# Altium PCB PCB1.PcbDoc
Units mm, origin at the board's own origin, x right, y up, seen from the top; angles counter-clockwise.
Board outline 152.4 x 101.6 mm, 2 copper layers (Top Layer, Bottom Layer); 72 components, 65 nets, 347 pads, 0 vias.
Unrouted connection lines stored in the file: 235.
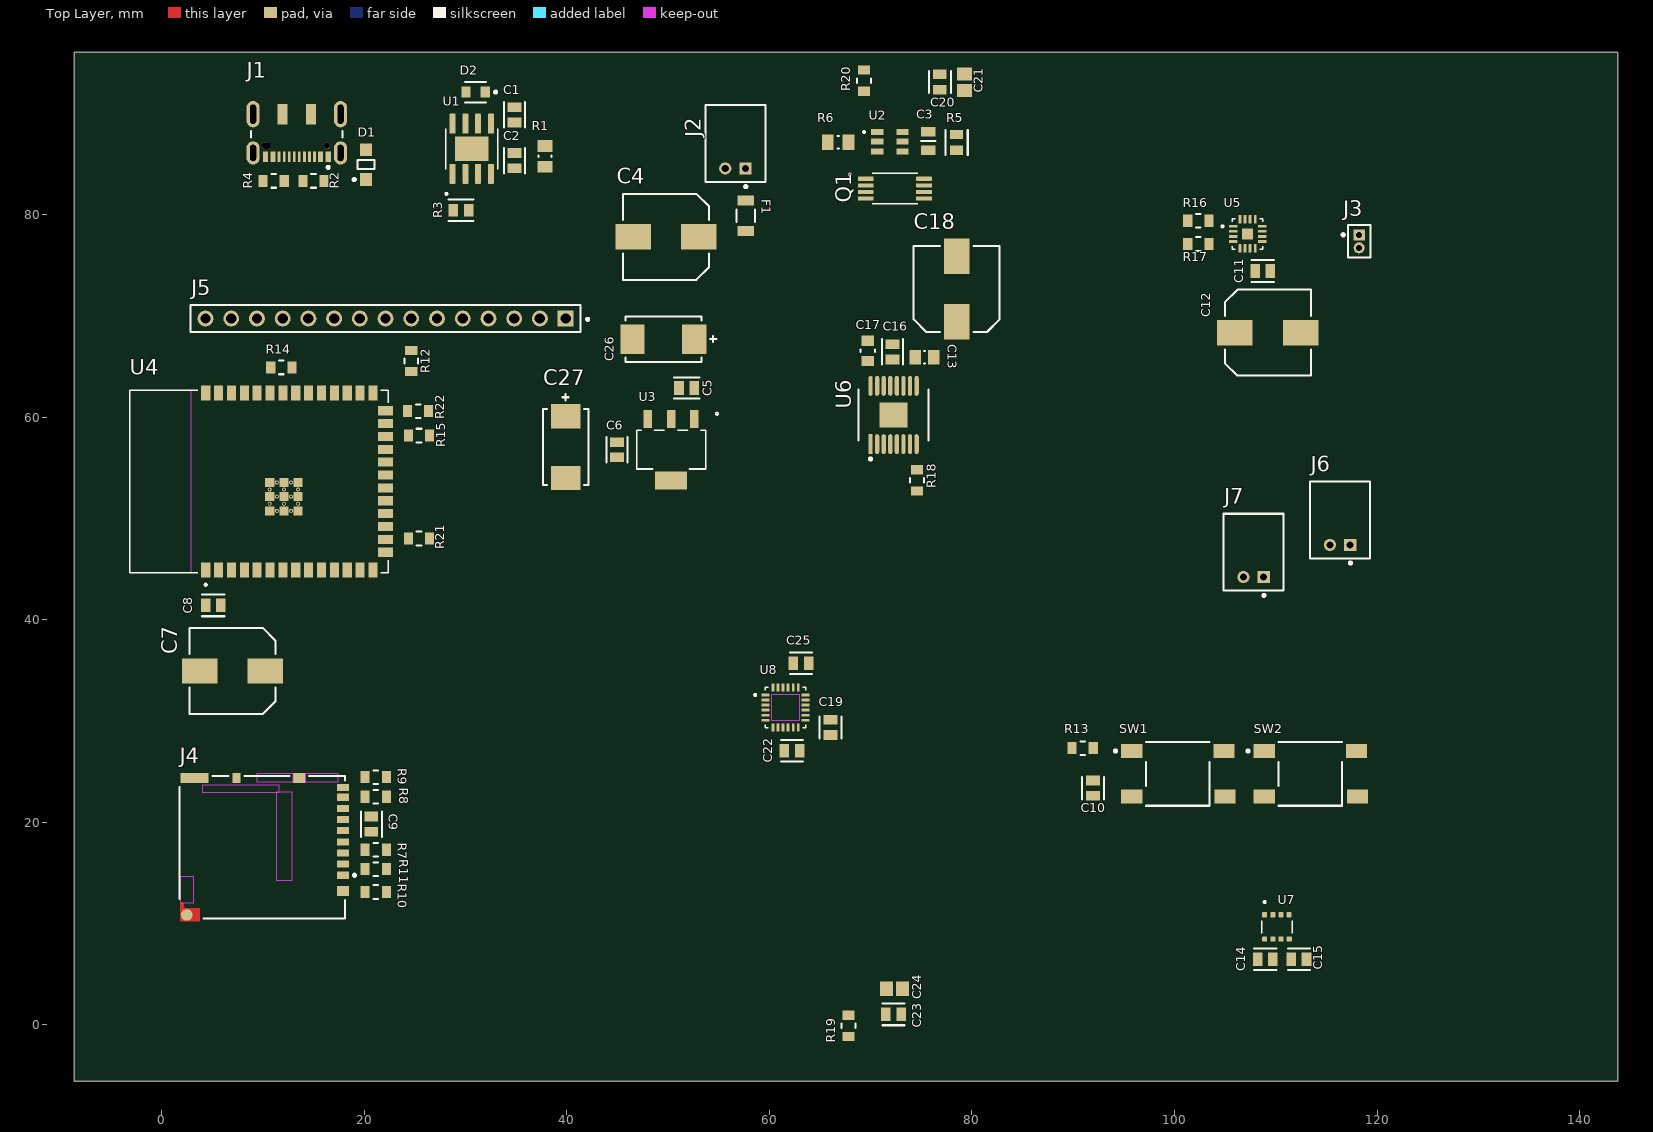
[diagram p0: Top Layer view]
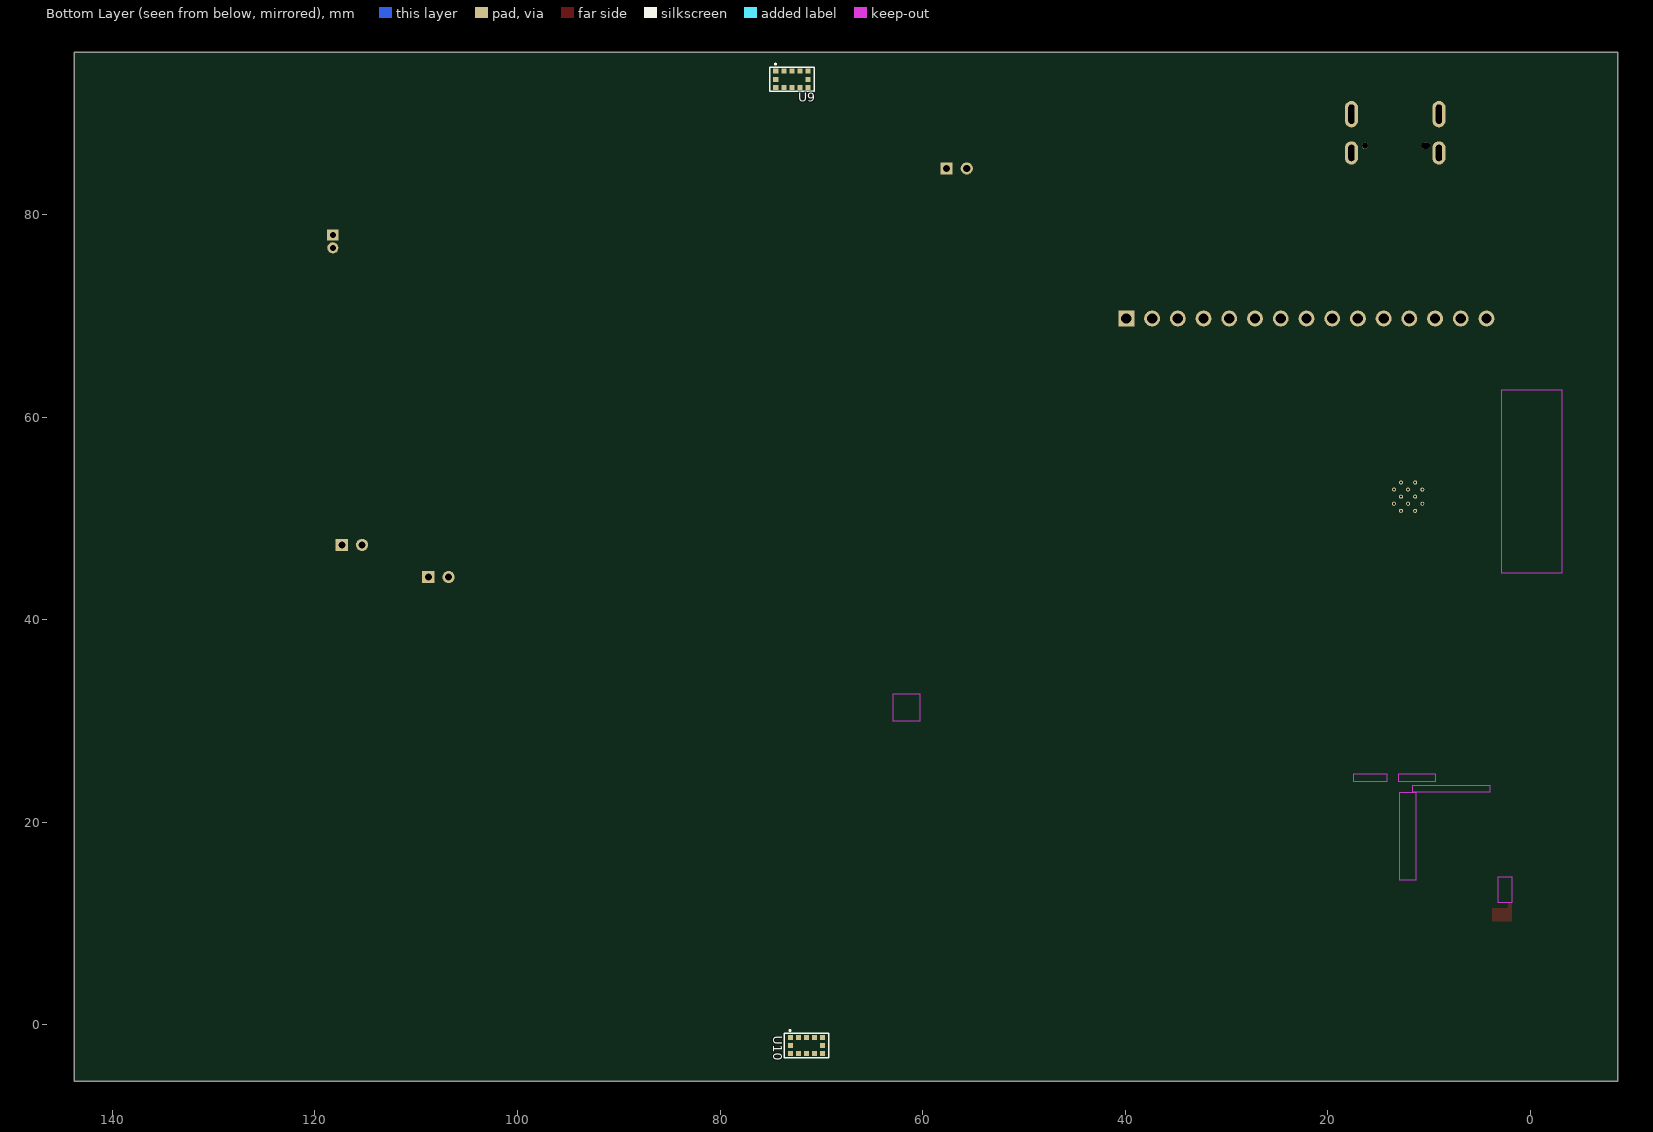
[diagram p1: Bottom Layer view, seen from below]

## Layer stack, top to bottom
Top Solder: solder mask 0.0102, Solder Resist, Dk 3.5
Top Layer: signal copper 0.0356
Dielectric 1: dielectric 0.32, FR-4, Dk 4.8
Bottom Layer: signal copper 0.0356
Bottom Solder: solder mask 0.0102, Solder Resist, Dk 3.5

## Board outline
-8.636,-5.588 143.764,-5.588 143.764,96.012 -8.636,96.012

## Design rules (kind name [scope] priority, off if disabled: settings)
Clearance [All] p1: gap=0.254 ignorepadtopadclearanceinfootprint=FALSE except(0.15: SMDPad-SMDPad)
PolygonConnect [All] p1: connectstyle=Relief reliefconductorwidth=0.254 reliefentries=4 polygonreliefangle="90 Angle" airgapwidth=0.254
RoutingVias [All] p1: holewidth=0.711 width=1.27 viastyle="Through Hole" minholewidth=0.711 minwidth=1.27 maxholewidth=0.711 maxwidth=1.27
SolderMaskExpansion [All] p1: expansion=0.102 istentingtop=FALSE
SupplyNets "Schematic Supply Nets_1" [InNet('3V3')] p1: voltage=0.000
SupplyNets "Schematic Supply Nets" [InNet('GND')] p2: voltage=0.000
Width [All] p1: maxlimit=0.254 minlimit=0.254 preferedwidth=0.254
30 further rules are at their usual default settings.

## Classes and differential pairs
component class Sensors: C13 C14 C15 C16 C17 C18 C19 C20 C21 C22 C23 C24 C25 J6 J7 R18 R19 R20 R21 R22 U6 U7 U8 U9 U10
component class Power: C1 C2 C3 C4 C5 C6 C26 C27 D1 D2 F1 J1 J2 Q1 R1 R2 R3 R4 R5 R6 U1 U2 U3
component class mcu: C7 C8 C9 C10 C11 C12 J3 J4 J5 R7 R8 R9 R10 R11 R12 R13 R14 R15 R16 R17 SW1 SW2 U4 U5

## Components (designator, comment, footprint, x,y, rotation, side; value= is the part's Value field where it differs from the comment)
C1 "C0805C106J8RACAUTO" FP-C0805C106J8RACAUTO-MFG 34.836,89.832 r90 top
C2 "C0805C106J8RACAUTO" FP-C0805C106J8RACAUTO-MFG 34.836,85.316 r90 top
C3 "CC0805KKX7RYBB104" FP-CC0805-EB-MFG 75.692,87.249 r90 top
C4 "UUD1V221MNL1GS" NIC-CAPA2-8X10_V 49.785,77.791 r180 top
C5 "C0805C106J8RACAUTO" FP-C0805C106J8RACAUTO-MFG 51.828,62.865 r180 top
C6 "C0805C106J8RACAUTO" FP-C0805C106J8RACAUTO-MFG 44.958,56.769 r270 top
C7 "UUD1V221MNL1GS" NIC-CAPA2-8X10_V 6.985,34.925 r180 top
C8 "C0805C104K4RACAUTO" FP-C0805C-DN-MFG 5.092,41.402 r180 top value="0.10 μF"
C9 "C0805C106J8RACAUTO" FP-C0805C106J8RACAUTO-MFG 20.701,19.8 r90 top
C10 "C0805C104K4RACAUTO" FP-C0805C-DN-MFG 91.948,23.356 r90 top value="0.10 μF"
C11 "C0805C104K4RACAUTO" FP-C0805C-DN-MFG 108.724,74.422 r0 top value="0.10 μF"
C12 "UUD1V221MNL1GS" NIC-CAPA2-8X10_V 109.22,68.326 r0 top
C13 "CAP 10nF 50V 0805(2012)" CAPC0805(2012)145_N 75.311,65.905 r0 top value=10nF
C14 "C0805C104K4RACAUTO" FP-C0805C-DN-MFG 108.964,6.448 r180 top value="0.10 μF"
C15 "C0805C104K4RACAUTO" FP-C0805C-DN-MFG 112.286,6.448 r180 top value="0.10 μF"
C16 "C0805C106J8RACAUTO" FP-C0805C106J8RACAUTO-MFG 72.157,66.427 r90 top
C17 "08053C225K4Z2A" FP-0805-L_2_01_0_2-W_1_25-MFG 69.723,66.532 r90 top
C18 "UUD1V221MNL1GS" NIC-CAPA2-8X10_V 78.486,72.644 r90 top
C19 "C0805C104K4RACAUTO" FP-C0805C-DN-MFG 66.04,29.349 r90 top value="0.10 μF"
C20 "C0805C104K4RACAUTO" FP-C0805C-DN-MFG 76.835,93.079 r270 top value="0.10 μF"
C21 "4.7 μF" CAPC2013X140X50NL20T25 79.264,93.053 r270 top
C22 "C0805C104K4RACAUTO" FP-C0805C-DN-MFG 62.23,27.051 r0 top value="0.10 μF"
C23 "C0805C104K4RACAUTO" FP-C0805C-DN-MFG 72.251,1.016 r0 top value="0.10 μF"
C24 "4.7 μF" CAPC2013X140X50NL20T25 72.352,3.556 r0 top
C25 "C0805C222J1GACAUTO" FP-C0805C-DN-MFG 63.119,35.687 r0 top value="2,200 pF"
C26 "10TPC100M" FP-POSCAP-D2-MFG 49.528,67.691 r0 top
C27 "10TPC100M" FP-POSCAP-D2-MFG 39.878,57.025 r90 top
D1 "SMF5.0AT1G" ONSC-SOD-123FL-2-498_V 20.169,84.925 r90 top
D2 "SML-LXT0805IW-TR" FP-SML-LXT0805IW-TR-MFG 30.988,92.075 r180 top
F1 "MF-NSMF200-2" FP-MF-NSMF200-2-MFG 57.658,79.883 r270 top value=85mΩ
J1 "DX07S016JA1R1500" FP-DX07S016JA1R1500-MFG 13.335,88.9 r180 top
J2 "(D)S2B-PH-K-S (LF)(SN)" FP-D_S2B-PH-K-S_LF_SN-MFG 56.642,86.995 r0 top
J3 "M50-3530242" FP-M50-3530242-MFG 118.237,77.343 r270 top
J4 "DM3AT-SF-PEJM5" FP-DM3AT-SF-PEJM5-MFG 9.906,17.526 r270 top
J5 "TSW-115-07-G-S" FP-TSW-115-07-G-S-MFG 22.098,69.723 r0 top
J6 "(D)S2B-PH-K-S (LF)(SN)" FP-D_S2B-PH-K-S_LF_SN-MFG 116.348,49.821 r0 top
J7 "(D)S2B-PH-K-S (LF)(SN)" FP-D_S2B-PH-K-S_LF_SN-MFG 107.807,46.646 r0 top
Q1 "FS8205A" SOP65P640X120-8N 72.39,82.55 r0 top
R1 "MCU0805MD1001BP100" FP-MCU0805-IPC_A 37.846,85.725 r270 top
R2 "AC0805JR-075K1L" FP-AC0805-MFG 14.986,83.312 r180 top value=5.1KΩ
R3 "RMCF0805JG1K20" FP-RMCF0805-IPC_C 29.547,80.413 r0 top
R4 "AC0805JR-075K1L" FP-AC0805-MFG 11.049,83.312 r180 top value=5.1KΩ
R5 "CRCW0805100RJNEAHP" FP-CRCW0805-HPe3-IPC_C 78.486,87.122 r90 top
R6 "MCU0805MD1001BP100" FP-MCU0805-IPC_A 66.782,87.12 r0 top
R7 "RT0805FRD0710KL" FP-RT0805-MFG 21.135,17.271 r180 top value=10KΩ
R8 "RT0805FRD0710KL" FP-RT0805-MFG 21.135,22.504 r180 top value=10KΩ
R9 "RT0805FRD0710KL" FP-RT0805-MFG 21.135,24.441 r180 top value=10KΩ
R10 "RT0805FRD0710KL" FP-RT0805-MFG 21.135,13.103 r0 top value=10KΩ
R11 "RT0805FRD0710KL" FP-RT0805-MFG 21.135,15.355 r0 top value=10KΩ
R12 "RT0805FRD0710KL" FP-RT0805-MFG 24.638,65.532 r90 top value=10KΩ
R13 "RT0805FRD0710KL" FP-RT0805-MFG 90.932,27.305 r180 top value=10KΩ
R14 "RT0805FRD0710KL" FP-RT0805-MFG 11.811,64.897 r180 top value=10KΩ
R15 "RT0805FRD0710KL" FP-RT0805-MFG 25.4,58.166 r180 top value=10KΩ
R16 "RT0805DRD07100KL" FP-RT0805-MFG 102.362,79.375 r180 top value=100KΩ
R17 "RT0805DRD07100KL" FP-RT0805-MFG 102.362,77.089 r180 top value=100KΩ
R18 "RT0805FRD0710KL" FP-RT0805-MFG 74.577,53.741 r90 top value=10KΩ
R19 "RT0805FRD0710KL" FP-RT0805-MFG 67.818,-0.127 r90 top value=10KΩ
R20 "RT0805FRD0710KL" FP-RT0805-MFG 69.342,93.218 r90 top value=10KΩ
R21 "RT0805FRD0710KL" FP-RT0805-MFG 25.4,48.006 r0 top value=10KΩ
R22 "RT0805FRD0710KL" FP-RT0805-MFG 25.307,60.579 r0 top value=10KΩ
SW1 "2-1977223-2" FP-2-1977223-2-MFG 100.33,24.765 r90 top
SW2 "2-1977223-2" FP-2-1977223-2-MFG 113.411,24.765 r90 top
U1 "TP4056" SOP127P600X175-9N 30.607,86.487 r90 top
U2 "DW01A" SOT95P280X145-6N 71.897,87.183 r0 top
U3 "AP2114HA-3.3TRG1" SOT-223_DIO 50.292,56.769 r180 top
U4 "ESP32-S3-WROOM-1-N16R2" XCVR_ESP32-S3-WROOM-1-N16R2 9.602,53.635 r90 top
U5 "MAX98357AETE+T" QFN50P300X300X80-17N 107.215,78.081 r0 top
U6 "DRV8833PWPR" FP-PWP0016C-IPC_A 72.263,60.198 r90 top
U7 "BME680" PSON80P300X300X100-8N 110.109,9.652 r0 top
U8 "MPU-6050" QFN50P400X400X95-24N 61.599,31.304 r0 top
U9 "VL53L0X" SENSOR_VL53L0X 72.898,93.345 r180 bottom
U10 "VL53L0X" SENSOR_VL53L0X 71.463,-2.07 r180 bottom

## Footprints (in the part's own frame and the unit in brackets; to place one, negate y for a bottom-side part, rotate by r counter-clockwise, add the part's x,y. Pads: shape width x height; smd on the part's side, far side on the other; paste and mask are expansions set on the pad)
CAPC0805(2012)145_N [mm] "Chip Capacitor, Body 2.0x1.2mm, Height 1.45mm, IPC Medium Density"
  rect 1.15x1.45 smd: 1(-0.9,0) 2(0.9,0)
  silkscreen extent -0.05,-0.62 0.05,0.63, body extent -1.1,-0.72 1.1,0.73, height 1.45
CAPC2013X140X50NL20T25 [mm] "Chip Capacitor, 2-Leads, Body 2.00x1.25mm, IPC Medium Density"
  rect 1.3x1.45 smd: 1(-0.8,0) 2(0.8,0)
  body extent -1.1,-0.72 1.1,0.72, height 1.4
FP-2-1977223-2-MFG [mm]
  rect 1.4x2.1 smd paste+0 mask+0: 1(2.25,4.55) 2(2.25,-4.55) 3(-2.25,4.55) 4(-2.25,-4.65)
  silkscreen extent -3.15,-3.15 3.15,6.27, body extent -3.25,-5.8 3.25,5.7, height 0.25
FP-0805-L_2_01_0_2-W_1_25-MFG [mm]
  rect 1x1.25 smd paste+0 mask+0: 1(-1,0) 2(1,0)
  silkscreen extent -0.13,-0.72 0.13,0.72, body extent -1.6,-0.82 1.6,0.82, height 0.25
FP-AC0805-MFG [mm]
  rect 0.9x1.2 smd paste+0 mask+0: 1(-1.05,0) 2(1.05,0)
  silkscreen extent -0.23,-0.67 0.23,0.67, body extent -1.6,-0.77 1.6,0.77, height 0.25
FP-C0805C106J8RACAUTO-MFG [mm]
  rect 0.95x1.35 smd paste+0 mask+0: 1(-0.75,0) 2(0.75,0)
  silkscreen extent -1.25,-1.05 1.25,1.05, body extent -1.4,-0.85 1.4,0.85, height 0.25
FP-C0805C-DN-MFG [mm]
  rect 0.95x1.35 smd paste+0 mask+0: 1(-0.75,0) 2(0.75,0)
  silkscreen extent -1.1,-1.07 1.1,1.07, body extent -1.4,-0.85 1.4,0.85, height 0.25
FP-CC0805-EB-MFG [mm]
  rect 0.95x1.4 smd paste+0 mask+0: 1(-0.925,0) 2(0.925,0)
  silkscreen extent 0,-0.72 0,0.72, body extent -1.6,-1.05 1.6,1.05, height 0.25
FP-CRCW0805-HPe3-IPC_C [mm]
  rect 0.906x1.308 smd paste+0 mask+0: 1(-0.776,0) 2(0.776,0)
  silkscreen extent -1.23,-1.1 1.23,1.1, body extent -1.33,-0.8 1.33,0.8, height 0.25
FP-D_S2B-PH-K-S_LF_SN-MFG [mm]
  rect 1.2x1.2 hole 0.7 paste-2539.97 mask+0: 1(1,-2.45)
  round 1.2 hole 0.7 paste-2539.97 mask+0: 2(-1,-2.45)
  silkscreen extent -2.95,-4.37 2.95,3.8, body extent -3.05,-3.9 3.05,3.9, height 0.25
FP-DM3AT-SF-PEJM5-MFG [mm]
  rect 0.7x1.2 smd paste+0 mask+0: 1(2.775,7.975) 2(1.675,7.975) 3(0.575,7.975) 4(-0.525,7.975) 5(-1.625,7.975) 6(-2.725,7.975) 7(-3.825,7.975) 8(-4.925,7.975) 9(-5.875,7.975)
  rect 1x0.8 smd paste+0 mask+0: 10(-6.825,-2.525)
  rect 1x1.2 smd paste+0 mask+0: 11(4.325,7.975) 12(-6.825,3.675)
  rect 1x2.8 smd paste+0 mask+0: 13(-6.825,-6.675)
  round 1.145 smd paste+0 mask+0: 14(6.689,-7.439)
  Top Layer region: 6.025,-6.175 7.325,-6.175 7.325,-8.075 5.475,-8.075 5.475,-7.725 5.875,-7.725 6.025,-7.575 6.025,-6.175
  Keep-Out Layer region: 2.925,-8.075 5.475,-8.075 5.475,-6.725 2.925,-6.725
  Keep-Out Layer region: -7.225,-0.525 -6.475,-0.525 -6.475,3.075 -7.225,3.075
  Keep-Out Layer region: -7.225,4.275 -6.475,4.275 -6.475,7.525 -7.225,7.525
  Keep-Out Layer region: -6.122,-5.925 -5.422,-5.925 -5.422,1.675 -6.122,1.675
  Keep-Out Layer region: -5.425,1.375 3.275,1.375 3.275,2.975 -5.425,2.975
  silkscreen extent -7.02,-8.18 7.02,9.25, body extent -7.42,-8.27 7.42,8.67, height 0.25
FP-DX07S016JA1R1500-MFG [mm]
  rrect100% 1.3x2.3 hole 1.6 slot 0.6 at 0 deg paste-2539.97 mask+0: 1(-4.32,2.825) 2(4.32,2.825)
  rrect100% 1.3x2.6 hole 1.9 slot 0.6 at 0 deg paste-2539.97 mask+0: 3(-4.32,-1) 6(4.32,-1)
  rect 1x2 smd paste+0 mask+0: 4(-1.4,-1) 5(1.4,-1)
  rect 0.52x1 smd paste+0 mask+0: A1/B12(-3.1,3.2) A4/B9(-2.35,3.2) A12/B1(3.1,3.2) B4/A9(2.35,3.2)
  rect 0.27x1 smd paste+0 mask+0: A5(-1.75,3.2) A6(-0.25,3.2) A7(0.75,3.2) A8(1.75,3.2) B5(1.25,3.2) B6(0.25,3.2) B7(-0.75,3.2) B8(-1.25,3.2)
  round 0.6 hole 0.6 unplated paste-2539.97 mask+0: ""(-3,2.1)
  rrect100% 0.85x0.6 hole 0.6 slot 0.85 at 0 deg unplated paste-2539.97 mask+0: ""(3,2.1)
  silkscreen extent -4.52,0.67 4.52,4.37, body extent -5.07,-3.75 5.07,4.08, height 0.25
FP-M50-3530242-MFG [mm]
  rect 1.1x1.1 hole 0.6 paste-2539.97 mask+0: 1(-0.635,0)
  round 1.1 hole 0.6 paste-2539.97 mask+0: 2(0.635,0)
  silkscreen extent -1.6,-1.7 1.6,1.1, body extent -1.62,-1.2 1.62,1.2, height 0.25
FP-MCU0805-IPC_A [mm]
  rect 1.159x1.508 smd paste+0 mask+0: 1(-1.027,0) 2(1.027,0)
  silkscreen extent -0.07,-0.63 0.07,0.63, body extent -2.11,-1.25 2.11,1.25, height 0.25
FP-MF-NSMF200-2-MFG [mm]
  rect 1x1.6 smd paste+0 mask+0: 1(-1.5,0) 2(1.5,0)
  silkscreen extent -0.63,-0.9 0.63,0.9, body extent -2.1,-1 2.1,1, height 0.25
FP-POSCAP-D2-MFG [mm]
  rect 2.4x2.9 smd paste+0 mask+0: 1(-3.05,0) 2(3.05,0)
  silkscreen extent -3.75,-2.25 5.23,2.25, body extent -4.35,-2.35 4.35,2.35, height 0.25
FP-PWP0016C-IPC_A [mm]
  rect 1.955x0.421 smd paste+0 mask+0: 1(-2.875,2.275)
  rrect100% 1.955x0.421 smd paste+0 mask+0: 2(-2.875,1.625) 3(-2.875,0.975) 4(-2.875,0.325) 5(-2.875,-0.325) 6(-2.875,-0.975) 7(-2.875,-1.625) 8(-2.875,-2.275) 9(2.875,-2.275) 10(2.875,-1.625) 11(2.875,-0.975) 12(2.875,-0.325) 13(2.875,0.325) 14(2.875,0.975) 15(2.875,1.625) 16(2.875,2.275)
  rect 2.46x2.77 smd paste-1000 mask+0: 17(0,0)
  silkscreen extent -4.48,-3.45 2.5,3.45, body extent -4.35,-3 4.35,3, height 0.25
FP-RMCF0805-IPC_C [mm]
  rect 0.955x1.262 smd paste+0 mask+0: 1(-0.776,0) 2(0.776,0)
  silkscreen extent -1.25,-1.07 1.25,1.07, body extent -1.35,-0.77 1.35,0.77, height 0.25
FP-RT0805-MFG [mm]
  rect 0.9x1.2 smd paste+0 mask+0: 1(-1.05,0) 2(1.05,0)
  silkscreen extent -0.23,-0.67 0.23,0.67, body extent -1.6,-0.77 1.6,0.77, height 0.25
FP-SML-LXT0805IW-TR-MFG [mm]
  rect 0.9x1.1 smd paste+0 mask+0: 1(-0.95,0) 2(0.95,0)
  silkscreen extent -2.1,-1 1.05,1, body extent -1.5,-0.8 1.5,0.8, height 0.25
FP-TSW-115-07-G-S-MFG [mm]
  rect 1.57x1.57 hole 1.02 paste-2539.97 mask+0: 1(17.78,0)
  round 1.57 hole 1.02 paste-2539.97 mask+0: 2(15.24,0) 3(12.7,0) 4(10.16,0) 5(7.62,0) 6(5.08,0) 7(2.54,0) 8(0,0) 9(-2.54,0) 10(-5.08,0) 11(-7.62,0) 12(-10.16,0) 13(-12.7,0) 14(-15.24,0) 15(-17.78,0)
  silkscreen extent -19.24,-1.34 20.09,1.34, body extent -19.34,-1.44 19.34,1.44, height 0.25
NIC-CAPA2-8X10_V [mm] "Aluminum Electrolytic Capacitor, Diameter 8mm, Height 10.8mm, Pitch 6.5mm"
  rect 3.5x2.5 smd: 1(-3.25,0) 2(3.25,0)
  silkscreen extent -4.25,-4.25 4.25,4.25, body extent -3.99,-3.97 3.99,4, height 10.8
ONSC-SOD-123FL-2-498_V [mm] "SOD, 2-Leads, Body 2.7x1.65mm"
  rect 1.25x1.22 smd: 1(-1.475,0) 2(1.475,0)
  silkscreen extent -1.6,-0.82 0.45,1.28, body extent -1.35,-0.82 1.35,0.82, height 0.98
PSON80P300X300X100-8N [mm]
  rrect25% 0.5x0.5 smd: 1(-1.2,1.2) 2(-0.4,1.2) 3(0.4,1.2) 4(1.2,1.2) 5(1.22,-1.2) 6(0.4,-1.2) 7(-0.4,-1.2) 8(-1.2,-1.2)
  silkscreen extent -1.5,-0.63 1.5,2.55, body extent -1.5,-1.5 1.5,1.5, height 1
QFN50P300X300X80-17N [mm]
  rrect25% 0.84x0.27 smd: 1(-1.435,0.75) 2(-1.435,0.25) 3(-1.435,-0.25) 4(-1.435,-0.75) 9(1.435,-0.75) 10(1.435,-0.25) 11(1.435,0.25) 12(1.435,0.75)
  rrect25% 0.27x0.84 smd: 5(-0.75,-1.435) 6(-0.25,-1.435) 7(0.25,-1.435) 8(0.75,-1.435) 13(0.75,1.435) 14(0.25,1.435) 15(-0.25,1.435) 16(-0.75,1.435)
  rect 1.1x1.1 smd paste-0.2: 17(0,0)
  silkscreen extent -2.57,-1.5 1.5,1.5, body extent -1.5,-1.5 1.5,1.5, height 0.9
QFN50P400X400X95-24N [mm]
  rect 0.79x0.28 smd: 1(-1.97,1.25) 2(-1.97,0.75) 3(-1.97,0.25) 4(-1.97,-0.25) 5(-1.97,-0.75) 6(-1.97,-1.25) 13(1.97,-1.25) 14(1.97,-0.75) 15(1.97,-0.25) 16(1.97,0.25) 17(1.97,0.75) 18(1.97,1.25)
  rect 0.28x0.79 smd: 7(-1.25,-1.97) 8(-0.75,-1.97) 9(-0.25,-1.97) 10(0.25,-1.97) 11(0.75,-1.97) 12(1.25,-1.97) 19(1.25,1.97) 20(0.75,1.97) 21(0.25,1.97) 22(-0.25,1.97) 23(-0.75,1.97) 24(-1.25,1.97)
  Keep-Out Layer region: 1.35,-1.3 -1.35,-1.3 -1.35,1.3 1.35,1.3
  silkscreen extent -3.1,-2 2,2, body extent -2,-2 2,2, height 0.93
SENSOR_VL53L0X [mm]
  rect 0.5x0.5 smd: 1(-1.6,0.8) 2(-0.8,0.8) 3(0,0.8) 4(0.8,0.8) 5(1.6,0.8) 6(1.6,0) 7(1.6,-0.8) 8(0.8,-0.8) 9(0,-0.8) 10(-0.8,-0.8) 11(-1.6,-0.8) 12(-1.6,0)
  silkscreen extent -2.2,-1.2 2.2,1.57
SOP65P640X120-8N [mm]
  rrect25% 1.56x0.4 smd: 1(-2.88,0.975) 2(-2.88,0.325) 3(-2.88,-0.325) 4(-2.88,-0.975) 5(2.88,-0.975) 6(2.88,-0.325) 7(2.88,0.325) 8(2.88,0.975)
  silkscreen extent -4.54,-1.52 2.25,1.52, body extent -3.2,-1.47 3.2,1.47, height 1.2
SOP127P600X175-9N [mm]
  rrect25% 1.97x0.6 smd: 1(-2.475,1.905) 2(-2.475,0.635) 3(-2.475,-0.635) 4(-2.475,-1.905) 5(2.475,-1.905) 6(2.475,-0.635) 7(2.475,0.635) 8(2.475,1.905)
  rect 2.413x3.302 smd paste-3: 9(0,0)
  silkscreen extent -4.54,-2.55 2,2.6, body extent -3,-2.45 3,2.45, height 1.75
SOT95P280X145-6N [mm]
  rect 1.21x0.59 smd: 1(-1.255,0.95) 2(-1.255,0) 3(-1.255,-0.95) 4(1.255,-0.95) 5(1.255,0) 6(1.255,0.95)
  silkscreen extent -2.65,0.85 -2.46,1.05, body extent -1.4,-1.45 1.4,1.45, height 1.45
SOT-223_DIO [mm]
  rect 0.851x1.761 smd paste+0 mask+0: 1(-2.3,-3.025) 2(0,-3.025) 3(2.3,-3.025)
  rect 3.151x1.761 smd paste+0 mask+0: 4(0,3.025)
  silkscreen extent -4.67,-3.68 3.4,1.9, body extent -3.27,-3.55 3.27,3.55, height 1.65
XCVR_ESP32-S3-WROOM-1-N16R2 [mm]
  rect 1.5x0.9 smd: 2(-8.75,3.99) 3(-8.75,2.72) 4(-8.75,1.45) 5(-8.75,0.18) 6(-8.75,-1.09) 7(-8.75,-2.36) 8(-8.75,-3.63) 9(-8.75,-4.9) 10(-8.75,-6.17) 11(-8.75,-7.44) 12(-8.75,-8.71) 13(-8.75,-9.98) 14(-8.75,-11.25) 27(8.75,-11.25) 28(8.75,-9.98) 29(8.75,-8.71) 30(8.75,-7.44) 31(8.75,-6.17) 32(8.75,-4.9) 33(8.75,-3.63) 34(8.75,-2.36) 35(8.75,-1.09) 36(8.75,0.18) 37(8.75,1.45) 38(8.75,2.72) 39(8.75,3.99) GND(-8.75,5.26) GND(8.75,5.26)
  rect 0.9x1.5 smd: 15(-6.985,-12.5) 16(-5.715,-12.5) 17(-4.445,-12.5) 18(-3.175,-12.5) 19(-1.905,-12.5) 20(-0.635,-12.5) 21(0.635,-12.5) 22(1.905,-12.5) 23(3.175,-12.5) 24(4.445,-12.5) 25(5.715,-12.5) 26(6.985,-12.5)
  round 0.4 hole 0.2 mask+0: 41_10(-1.5,-1.76) 41_11(-2.9,-1.76) 41_12(-0.1,-1.76) 41_13(-2.9,-3.16) 41_14(-1.5,-3.16) 41_15(-0.1,-3.16) 41_16(-2.2,-1.06) 41_17(-0.8,-1.06) 41_18(-2.2,-2.46) 41_19(-0.8,-2.46) 41_20(-2.2,-3.86) 41_21(-0.8,-3.86)
  rect 0.9x0.9 smd: GND(-2.9,-2.46) GND(-2.9,-1.06) GND(-2.9,-3.86) GND(-1.5,-1.06) GND(-1.5,-3.86) GND(-1.5,-2.46) GND(-0.1,-1.06) GND(-0.1,-2.46) GND(-0.1,-3.86)
  Keep-Out Layer region: 9,6.75 -9,6.75 -9,12.75 9,12.75
  Keep-Out Layer region: 9,6.75 -9,6.75 -9,12.75 9,12.75
  silkscreen extent -10.3,-12.75 9,12.75, body extent -9,-12.75 9,12.75, height 3.25

## Part data
C1 C2 C5 C6 C9 C16: library part CMP-03020-034708-1, "CAP CER 10UF 10V X7R 0805", Capacitance=10uF, Case Code (Imperial)=0805, Case Code (Metric)=2012, Max Operating Temperature=125°C, Min Operating Temperature=-55°C, Ratings=AEC-Q200, Tolerance=5%, Voltage Rating=10V, Case/Package=0805, Mount="Surface Mount", Packaging="Tape and Reel", RoHS Compliant=Yes
C3: library part CMP-00621-107850848-1, "CC0805KKX7RYBB104 Capacitor Ceramic 0.01uF 250V X7R 10% 0805 T/R", Capacitance=100nF, Case/Package=0805, Max Operating Temperature=125°C, Min Operating Temperature=-55°C, Tolerance=10%, Voltage Rating=250V, Height=1.45mm, Material=Ceramic, NexarPartId=107850848
C4 C7 C12 C18: library part CMP-0687-00080-1, "Aluminum Electrolytic Capacitor, UD Series, Low Impedance, 220 uF, 35 V, + / - 20%, -55 to 105 degC, Chip Type, 8 x 10 mm D x L, Pb-Free, Reel", Manufacturer=Nichicon, Rated Capacitance="220 uF", Rated Ripple Current (at 100kHz)="450 mA", Rated Voltage="35 V", Tolerance Rated Capacitance="-20 to 20%", ComponentLink1Description="Manufacturer URL", ComponentLink1URL=http://www.nichicon.co.jp/, ComponentLink2Description=Datasheet, ComponentLink2URL=http://products.nichicon.co.jp/en/pdf/XJA043/e-ud.pdf, ComponentLink3Description="Package Specification", ComponentLink3URL=http://products.nichicon.co.jp/en/pdf/XJA043/e-ud.pdf, DatasheetVersion=08/2012, Diameter="8 mm", Endurance Time="5000 h", Impedance="0.17 Ohm", Length="10 mm", Mounting Technology="Surface Mount", PackageDescription="2-Pin Surface Mount Device, Diameter 8 mm, Height 10 mm, Pitch 6.5 mm", PackageReference=CAPAE-D8H10, Packing="Dia382mm Reel", PartNumber=UUD1V221MNL1GS, RoHS=TRUE
C8 C10 C11 C14 C15 C19 C20 C22 C23: library part CMP-03020-005702-2, "C0805 0.10 μF X7R 30ppm/°C 10.00% 16 V", Capacitance="0.10 μF", Manufacturer=KEMET, Package=C0805C-DN, Temperature="-55°C to +125°C", Temperature Characteristic=X7R, Temperature Coefficient=30ppm/°C, Temperature Range High=+125°C, Temperature Range Low=-55°C, Tolerance=0.1, Voltage Rating="16 V", Automotive=No, Category=Cap, ComponentLink2Description=Datasheet, ComponentLink2URL=https://content.kemet.com/datasheets/KEM_C1003_C0G_SMD.pdf, Device Class L1="Passive Components", Device Class L2=Capacitors, Device Class L3="Ceramic Capacitors", Height=0.88mm, Ipc Land Pattern Name=CAPC200125X78, Lead Free=Yes, Manufacturer Part Number=C0805C104K4RACAUTO, Material=Ceramic, Octopart=https://octopart.com/c0805c104k4racauto-kemet-91893969, RoHS=TRUE
C13: library part CMP-1036-03843-1, "CAP 10nF 50V ±10% 0805 (2012 Metric) Thickness 1.45mm SMD", Case-EIA=0805, Case-Metric=2012, Rated Voltage="50 V", Tolerance=Â±10%, Max Thickness="1.45 mm", Technology=SMT
C17: library part CMP-04427-000048-1, "CAP CER 2.2UF 25V X7R 0805", Capacitance=2.2uF, Case Code (Imperial)=0805, Case Code (Metric)=2012, Max Operating Temperature=125°C, Min Operating Temperature=-55°C, Ratings=AEC-Q200, Tolerance=10%, Voltage Rating=25V, Case/Package=0805, Features="Soft Termination", Mount="Surface Mount", Packaging="Tape and Reel"
C21 C24: library part CMP-2007-04614-1, Manufacturer="AVX Interconnect / Elco", Part Number=08053D475KAT2A
C25: library part CMP-03020-010901-1, "C0805 2,200 pF C0G 30ppm/°C 5.00% 100 V", Capacitance="2,200 pF", Manufacturer=KEMET, Package=C0805C-DN, Temperature="-55°C to +125°C", Temperature Characteristic=C0G, Temperature Coefficient=30ppm/°C, Temperature Range High=+125°C, Temperature Range Low=-55°C, Tolerance=0.05, Voltage Rating="100 V", Automotive=No, Category=Cap, ComponentLink2Description=Datasheet, ComponentLink2URL=https://content.kemet.com/datasheets/KEM_C1003_C0G_SMD.pdf, Device Class L1="Passive Components", Device Class L2=Capacitors, Device Class L3="Ceramic Capacitors", Height=0.88mm, Ipc Land Pattern Name=CAPC200125X78, Lead Free=Yes, Manufacturer Part Number=C0805C222J1GACAUTO, Material=Ceramic, Octopart=https://octopart.com/c0805c222j1gacauto-kemet-75613142, RoHS=TRUE
C26 C27: library part CMP-05428-000328-1, "Molded Tantalum Polymer Capacitor 100uF 20% 10V life 2000Hours SMD 2917", Capacitance=100uF, Case Code (Imperial)=2917, Case Code (Metric)=7343, ESR (Equivalent Series Resistance)=45mR, Leakage Current=100uA, Max Operating Temperature=105°C, Min Operating Temperature=-55°C, Package Quantity=3000, Ripple Current=1.7A, Tolerance=20%, Voltage=10V, Case/Package=2917, Construction=Flat, Depth=4.3mm, Dissipation Factor=10%, Features="General Purpose", Height=1.9mm, Height - Seated (Max)=0.079inch, Lead Free="Lead Free", Length=7.3mm, Mount="Surface Mount", Number of Pins=2, Packaging="Tape and Reel", Polarity=Polar, Radiation Hardening=No, REACH SVHC="No SVHC", RoHS Compliant=Yes, Series="POSCAP™ TPC", Termination=SMD/SMT, Voltage Rating=10V, Voltage Rating (DC)=10V, Width=4.3mm
D1: library part CMP-1061-00612-1, "200 W Transient Voltage Suppressor, 2-Pin SOD-123FL, Pb-Free, Tape and Reel", Manufacturer="On Semiconductor", ComponentLink1Description="Manufacturer URL", ComponentLink1URL=http://www.onsemi.com/, ComponentLink2Description=Datasheet, ComponentLink2URL=http://www.onsemi.com/pub_link/Collateral/SMF5.0AT1-D.PDF, ComponentLink3Description="Package Specification", ComponentLink3URL=http://www.onsemi.com/pub_link/Collateral/498-01.PDF, DatasheetVersion="Rev. 7", Direction=Unidirectional, IR Max (uA)=400, Mounting Technology="Surface Mount", PackageDescription="2-Pin SOD, Body 1.65 x 2.7 mm", PackageReference=SOD-123FL-2-498, PackageVersion="Rev. D, 05/2013", Packing="Tape and Reel", PartNumber=SMF5.0AT1G, RoHS=Pb-Free, V(BR) Typ (V)=6.7
D2: library part CMP-1724-00002-2, "LED RED DIFFUSED SMD", Case Code (Imperial)=0805, Case Code (Metric)=2012, Color=Red, Forward Current=20mA, Forward Voltage=2V, Lens Color=White, Max Operating Temperature=80°C, Min Operating Temperature=-25°C, Package Quantity=1, Approvals=UL, Case/Package=0805, Dominant Wavelength=635nm, Height=0.8mm, Illumination Color=Red, Lead Free="Lead Free", Length=2mm, Lens Style=Rectangular, Lens Transparency=Diffused, Luminous Intensity=11mcd, Mount="Surface Mount", Number of LEDs=1, Number of Pins=2, Packaging="Tape and Reel", REACH SVHC="No SVHC", Test Current=20mA, Viewing Angle=140°, Wavelength=635nm, Width=1.25mm
F1: library part CMP-07400-000004-1, "PTC RESET FUSE 6V 2A 1206", Ambient Temperature Range High=+85°C, Ambient Temperature Range Low=-40°C, Current Rating=100A, Hold Current=2A, Manufacturer="Bourns Inc.", Resistance=85mΩ, Temperature="-40°C to +85°C", Trip Current=4A, Voltage Rating=6V, Automotive=Yes, Automotive Grade="Grade 3", Category=Fuse, ComponentLink2Description=Datasheet, ComponentLink2URL=https://bourns.com/docs/product-datasheets/mfnsmf.pdf?sfvrsn=39c76af6_14, Device Class L1="Circuit Protection", Device Class L2="PTC Resettable Fuses", Device Class L3=unset, Digikey Description="PTC RESET FUSE 6V 2A 1206", Height=1.6mm, Ipc Land Pattern Name=CAPC325160X115, Lead Free=Yes, Manufacturer Part Number=MF-NSMF200-2, Mouser Description="Resettable Fuses - PPTC 2V 6V 0.02ohm (R)", Octopart=https://octopart.com/mf-nsmf200-2-bourns-90790, Package=MF-NSMF200-2, RoHS=TRUE, Temperature Range High=+85°C, Temperature Range Low=-40°C, Trip Time=1s
J1: library part CMP-19038-000003-1, "CONN RCP USB2.0 TYP C 24P SMD RA"
J2 J6 J7: library part CMP-17439-000701-1, "CONN HEADER R/A 2POS 2MM"
J3: library part CMP-15831-000040-1, "CONN HEADER VERT 2POS 1.27MM"
J4: library part CMP-2000-05150-2, "CONN MICRO SD CARD PUSH-PUSH R/A", Current Rating=500mA, Flammability Rating="UL94 V-0", Max Operating Temperature=85°C, Max Voltage Rating (AC)=125V, Min Operating Temperature=-25°C, Package Quantity=1, Connector Type=Connector, Contact Material="Copper Alloy", Contact Plating=Gold, Depth=15.95mm, Gender=Female, Height=1.68mm, Housing Material=Polymer, Lead Free="Lead Free", Length=15.95mm, Max Current Rating=500mA, Mount="Surface Mount", Number of Contacts=8, Number of Positions=8, Number of Rows=1, Orientation="Right Angle", Packaging="Tape and Reel", Pitch=1.1mm, Radiation Hardening=No, REACH SVHC="No SVHC", Termination=SMD/SMT, Voltage Rating=125V, Width=13.85mm
J5: library part CMP-02766-000090-1, "CONN HEADER VERT 15POS 2.54MM", Manufacturer=SAMTEC, Temperature="-55°C to +125°C", Temperature Range High=+125°C, Temperature Range Low=-55°C, Automotive=No, Category=Conn, ComponentLink2Description=Datasheet, ComponentLink2URL=http://suddendocs.samtec.com/catalog_english/tsw_th.pdf, Conn Gender=Male, Conn Orientation=Vertical, Contact Material=Gold,Nickel, Device Class L1=Connectors, Device Class L2="Headers and Wire Housings", Device Class L3=unset, Digikey Description="CONN HEADER VERT 15POS 2.54MM", Footprint Url=http://suddendocs.samtec.com/prints/tsw-xxx-xx-x-x-xx-xxx-footprint.pdf, Height=8.71mm, Lead Free=Yes, Manufacturer Part Number=TSW-115-07-G-S, Number of Contacts=15, Number of Rows=1, Octopart=https://octopart.com/tsw-115-07-g-s-samtec-272210, Package=TSW-115-07-G-S, Pitch=2.54mm, RoHS=TRUE
Q1: Package=Package, Check_prices=https://www.snapeda.com/parts/FS8205A/Fortune+Semiconductor/view-part/?ref=eda, MF="Fortune Semiconductor", MP=FS8205A, SnapEDA_Link=https://www.snapeda.com/parts/FS8205A/Fortune+Semiconductor/view-part/?ref=snap
R1 R6: library part CMP-02407-000288-1, "RES 1.05K OHM 0.5% 1/5W 0805", Case Code (Imperial)=0805, Case Code (Metric)=2012, Max Operating Temperature=155°C, Min Operating Temperature=-55°C, Power Rating=200mW, Resistance=1kR, Tolerance=0.1%, Voltage Rating=150V, Case/Package=0805, Composition="Thin Film", Height=0.52mm, Length=2mm, Packaging="Tape and Reel", Weight=0.000162oz, Width=1.25mm
R2 R4: library part CMP-2001-04477-2, "RES SMD 5.1K OHM 5% 1/8W 0805", Manufacturer=Yageo, Package=AC0805, Power Rating=1/8W, Resistance=5.1KΩ, Temperature="-55°C to +155°C", Temperature Range High=+155°C, Temperature Range Low=-55°C, Tolerance=0.05, Voltage Rating=150V, Automotive=Yes, Automotive Grade="Grade 0", Category=Res, ComponentLink2Description=Datasheet, ComponentLink2URL=http://www.yageo.com/documents/recent/PYu-AC_51_RoHS_L_6.pdf, Composition="Thick Film", Device Class L1="Passive Components", Device Class L2=Resistors, Device Class L3="Chip SMD Resistors", Digikey Description="RES SMD 5.1K OHM 5% 1/8W 0805", Footprint Url=http://www.yageo.com/exep/pages/download/literatures/PYu-R_Mount_10.pdf, Height=0.6mm, Ipc Land Pattern Name=RESC200125X50, Lead Free=Yes, Manufacturer Part Number=AC0805JR-075K1L, Mouser Description="Thick Film Resistors - SMD 5.1K ohm 5% 1/8W", Octopart=https://octopart.com/ac0805jr-075k1l-yageo-21711115, RoHS=TRUE, Series=AC
R3: library part CMP-26527-005543-1, "1.2kΩ ±5% 0.125W 0805 Thick Film Chip Resistor AEC-Q200 compliant", Case/Package=0805, Max Operating Temperature=155°C, Max Power Dissipation=125mW, Min Operating Temperature=-55°C, Resistance=1.2kR, Resistor Type="Thick Film", Temperature Coefficient=200ppm/°C, Tolerance=5%, Contact Plating=Tin, Features="Automotive AEC-Q200", Height=0.026inch, Length=0.079inch, Mount="Surface Mount", Number of Terminations=2, Packaging="Tape and Reel", Radiation Hardening=No, RoHS Compliant=Yes, Series=RMCF, Width=0.049inch
R5: library part CMP-02407-002130-1, "RES Thick Film, 100Ω, 5%, 0.5W, 200ppm/°C, 0805", Case Code (Imperial)=0805, Case Code (Metric)=2012, Max Operating Temperature=155°C, Max Power Dissipation=333mW, Min Operating Temperature=-55°C, Package Quantity=1, Power Rating=330mW, Resistance=100R, Temperature Coefficient=200ppm/°C, Tolerance=5%, Voltage Rating=150V, Case/Package=0805, Composition="Thick Film", Contact Plating=Tin, Features="Automotive AEC-Q200", Height=0.024inch, Lead Free="Lead Free", Length=0.079inch, Number of Terminations=2, Packaging="Tape and Reel", Radiation Hardening=No, Termination=SMD/SMT, Weight=0.000194oz, Width=0.049inch
R7 R8 R9 R10 R11 R12 R13 R14 R15 R18 R19 R20 R21 R22: library part CMP-03412-035478-1, "RES SMD 10K OHM 1% 1/8W 0805", Manufacturer=Yageo, Package=RT0805, Power Rating=0.125W, Resistance=10KΩ, Temperature="-55°C to +155°C", Temperature Coefficient="25 ppm/°C", Temperature Range High=+155°C, Temperature Range Low=-55°C, Tolerance=0.0001, Voltage Rating=150V, Automotive=No, Category=Res, ComponentLink2Description=Datasheet, ComponentLink2URL=http://www.yageo.com/documents/recent/PYu-RT_1-to-0.01_RoHS_L_9.pdf, Composition="Thin Film", Device Class L1="Passive Components", Device Class L2=Resistors, Device Class L3="Chip SMD Resistors", Digikey Description="RES SMD 10K OHM 1% 1/8W 0805", Footprint Url=http://www.yageo.com/exep/pages/download/literatures/PYu-R_Mount_10.pdf, Height=0.6mm, Ipc Land Pattern Name=RESC200125X50, Lead Free=Yes, Manufacturer Part Number=RT0805FRD0710KL, Octopart=https://octopart.com/rt0805frd0710kl-yageo-71399701, RoHS=TRUE, Series=RT
R16 R17: library part CMP-2001-01780-2, "RES SMD 100K OHM 0.5% 1/8W 0805", Manufacturer=Yageo, Package=RT0805, Power Rating=0.125W, Resistance=100KΩ, Temperature="-55°C to +155°C", Temperature Coefficient="25 ppm/°C", Temperature Range High=+155°C, Temperature Range Low=-55°C, Tolerance=0.01, Voltage Rating=150V, Automotive=No, Category=Res, ComponentLink2Description=Datasheet, ComponentLink2URL=http://www.yageo.com/documents/recent/PYu-RT_1-to-0.01_RoHS_L_9.pdf, Composition="Thin Film", Device Class L1="Passive Components", Device Class L2=Resistors, Device Class L3="Chip SMD Resistors", Digikey Description="RES SMD 100K OHM 0.5% 1/8W 0805", Footprint Url=http://www.yageo.com/exep/pages/download/literatures/PYu-R_Mount_10.pdf, Height=0.6mm, Ipc Land Pattern Name=RESC200125X50, Lead Free=Yes, Manufacturer Part Number=RT0805DRD07100KL, Octopart=https://octopart.com/rt0805drd07100kl-yageo-1251654, RoHS=TRUE, Series=RT
SW1 SW2: library part CMP-03407-000026-1, "SWITCH TACTILE SPST-NO 0.05A 24V", RoHS Compliant=Yes
U1: "Complete single cell Li-Ion battery with a constant current / constant voltage linear charger", Package=Package, Availability="Not in stock", Check_prices=https://www.snapeda.com/parts/TP4056/NanJing+Top+Power+ASIC+Corp./view-part/?ref=eda, MF="NanJing Top Power ASIC Corp.", MP=TP4056, Price=None, SnapEDA_Link=https://www.snapeda.com/parts/TP4056/NanJing+Top+Power+ASIC+Corp./view-part/?ref=snap
U2: "One Cell Lithium-ion/Polymer Battery Protection IC", Package="SOT-23-6 Fortune Semiconductor", Check_prices=https://www.snapeda.com/parts/DW01A/Fortune+Semiconductor/view-part/?ref=eda, MF="Fortune Semiconductor", MP=DW01A, SnapEDA_Link=https://www.snapeda.com/parts/DW01A/Fortune+Semiconductor/view-part/?ref=snap
U3: "Description", Manufacturer_Name="Diodes Inc", Copyright="Copyright (C) 2025 Ultra Librarian. All rights reserved.", Manufacturer_Part_Number=AP2114HA-3.3TRG1, RefDes=RefDes, Type=Type
U4: "Bluetooth, WiFi 802.11b/g/n, Bluetooth v5.0 Transceiver Module 2.4GHz PCB Trace Surface Mount", Package="NON STANDARD Espressif Systems", Check_prices=https://www.snapeda.com/parts/ESP32S3WROOM1N16R2/Espressif+Systems/view-part/?ref=eda, MF="Espressif Systems", MP=ESP32S3WROOM1N16R2, SnapEDA_Link=https://www.snapeda.com/parts/ESP32S3WROOM1N16R2/Espressif+Systems/view-part/?ref=snap
U5: "Tiny, Low-Cost, PCM Class D Amplifier with Class AB Performance", Package="TQFN-16 Maxim", Check_prices=https://www.snapeda.com/parts/MAX98357AETE+T/Analog+Devices/view-part/?ref=eda, MF="Analog Devices", MP=MAX98357AETE+T, SnapEDA_Link=https://www.snapeda.com/parts/MAX98357AETE+T/Analog+Devices/view-part/?ref=snap
U6: library part CMP-1529-00004-3, "IC MOTOR DRIVER PAR 16HTSSOP", Case/Package=HTSSOP, Max Operating Temperature=85°C, Max Output Current=2A, Max Supply Voltage=10.8V, Min Operating Temperature=-40°C, Min Supply Voltage=2.7V, Nominal Supply Current=3mA, Output Current=1.5A, Package Quantity=2000, Fault Protection="Over Temperature", Interface=PWM, Lead Free="Lead Free", Number of Outputs=2, Number of Pins=16, Output Current per Channel=1.5A, Packaging="Tape and Reel", Radiation Hardening=No, REACH SVHC="No SVHC", RMS Current (Irms)=1.5A, RoHS Compliant=Yes, Series=DRV8833, Supply Current=3mA, Technology=NMOS
U7: "Gas, Humidity, Pressure, Temperature Sensor I2C, SPI Output", Package="LGA-8 Bosch Tools", Check_prices=https://www.snapeda.com/parts/BME680/Bosch+Sensortec/view-part/?ref=eda, MF="Bosch Sensortec", MP=BME680, SnapEDA_Link=https://www.snapeda.com/parts/BME680/Bosch+Sensortec/view-part/?ref=snap
U8: "MPU-6050 series Accelerometer, Gyroscope, 3 Axis Sensor Evaluation Board", Package="QFN-24 InvenSense", Check_prices=https://www.snapeda.com/parts/MPU-6050/TDK+InvenSense/view-part/?ref=eda, MF="TDK InvenSense", MP=MPU-6050, SnapEDA_Link=https://www.snapeda.com/parts/MPU-6050/TDK+InvenSense/view-part/?ref=snap
U9 U10: "VL53L0X - Light, 3D Time-of-Flight _ToF_ Sensor Evaluation Board", Package=None, Availability=Unavailable, MF=STMicroelectronics, MP=VL53L0X, Price=None, SnapEDA_Link=https://www.snapeda.com/parts/VL53L0X/STMicroelectronics/view-part/473967/?ref=snap

## Nets (pads, with @x,y where several pads share a name; then routed paths per layer and width w, separated by ;. In a path a pad name is that pad's centre, name@x,y a point inside that pad or via, vN(x,y) a via of type N, cw(c..) or ccw(c..) an arc to the next point about the centre after c; other vN are vias at no path point)
3V3: C6.1 C7.1 C8.1 C9.1 C14.2 C15.2 C19.2 C20.2 C21.2 C23.2 C24.2 C27.2 J4.4 J5.1 J5.2 R7.1 R8.1 R9.1 R10.2 R11.2 R12.1 R13.2 R14.1 R15.1 R17.2 R18.1 R19.2 R20.1 R21.2 R22.2 U3.3 U4.2 U7.2 U7.6 U7.8 U8.13 U9.1 U9.11 U10.1 U10.11
BAT_MIN: C3.2 J2.2 Q1.6 Q1.7 U2.6
BAT_PLU: C1.1 C4.1 C5.1 C11.1 C12.1 C13.1 C16.1 C18.1 C26.2 F1.2 R5.2 U1.5 U3.1 U5.7 U5.8 U6.12
BOOT: SW2.1 U4.27
D_MIN: J1.A7 J1.B7 U4.13
D_PLU: J1.A6 J1.B6 U4.14
EN: SW1.2 U4.3
GND: C1.2 C2.2 C4.2 C5.2 C6.2 C7.2 C8.2 C9.2 C10.1 C11.2 C12.2 C14.1 C15.1 C16.2 C17.2 C18.2 C19.1 C20.1 C21.1 C22.2 C23.1 C24.1 C25.2 C26.1 C27.1 D1.2 J1.1 J1.2 J1.3 J1.4 J1.5 J1.6 J1.A1/B12 J1.A8 J1.A12/B1 J1.B8 J4.6 J4.11 J4.12 J4.13 J4.14 J5.3 Q1.2 Q1.3 R2.2 R3.1 R4.2 R6.1 R16.2 SW1.3 SW1.4 SW2.3 U1.1 U1.3 U1.9 U3.2 U3.4 U4.GND U5.3 U5.11 U5.15 U5.17 U6.3 U6.6 U6.13 U6.17 U7.1 U7.5 U7.7 U8.1 U8.9 U8.11 U8.18 U9.2 U9.3 U9.4 U9.6 U9.12 U10.2 U10.3 U10.4 U10.6 U10.12
I2S_BCLK: U4.10 U5.16
I2S_DOUT: U4.23 U5.1
I2S_LRC: U4.11 U5.14
IO9: U4.17 U6.16
IO10: U4.18 U6.15
IO11: U4.19 U6.9
IO12: U4.20 U6.10
IO13: U4.21 U6.1
MOT1A: J7.1 U6.2
MOT1B: J7.2 U6.4
MOT2A: J6.1 U6.7
MOT2B: J6.2 U6.5
NetC3_1: C3.1 R5.1 U2.5
NetC10_2: C10.2 R13.1 SW1.1
NetC13_2: C13.2 U6.11
NetC17_1: C17.1 U6.14
NetC22_1: C22.1 U8.10
NetC25_1: C25.1 U8.20
NetD2_1: D2.1 R1.1
NetD2_2: D2.2 U1.7
NetF1_1: F1.1 J2.1
NetJ1_A5: J1.A5 R2.1
NetJ1_B5: J1.B5 R4.1
NetJ5_7: J5.7 R12.2
NetQ1_1: Q1.1 Q1.8
NetR3_2: R3.2 U1.2
NetR6_2: R6.2 U2.2
NetR16_1: R16.1 U5.2
NetR17_1: R17.1 U5.4
NetR18_2: R18.2 U6.8
NetR19_1: R19.1 U10.5
NetR20_2: R20.2 U9.5
OC: Q1.4 U2.3
OD: Q1.5 U2.1
OUTN: J3.1 U5.10
OUTP: J3.2 U5.9
SCL: J5.13 R15.2 U4.24 U7.4 U8.23 U9.10
SCL_2: R21.1 U4.16 U10.10
SD_CLK: J4.5 U4.5
SD_CMD: J4.3 R7.2 U4.4
SD_D0: J4.7 R8.2 U4.6
SD_D1: J4.8 R9.2 U4.7
SD_D2: J4.1 R10.1 U4.8
SD_D3: J4.2 R11.1 U4.9
SDA: J5.12 R14.2 U4.35 U7.3 U8.24 U9.9
SDA_2: R22.1 U4.26 U10.9
TAP_INT: U4.39 U8.12
TFT_BL: J5.11 U4.34
TFT_CS: J5.8 U4.31
TFT_DC: J5.9 U4.32
TFT_MISO: J5.4 U4.28
TFT_MOSI: J5.5 U4.29
TFT_RST: J5.10 U4.33
TFT_SCLK: J5.6 U4.30
TOUCH_INT: J5.14 U4.25
TOUCH_RST: J5.15 U4.12
VBUS: C2.1 D1.1 J1.A4/B9 J1.B4/A9 R1.2 U1.4 U1.8
pads on no net: J1. J4.9 J4.10 SW2.2 SW2.4 U1.6 U2.4 U4.15 U4.22 U4.36 U4.37 U4.38 U4.41_10 U4.41_11 U4.41_12 U4.41_13 U4.41_14 U4.41_15 U4.41_16 U4.41_17 U4.41_18 U4.41_19 U4.41_20 U4.41_21 U5.5 U5.6 U5.12 U5.13 U8.2 U8.3 U8.4 U8.5 U8.6 U8.7 U8.8 U8.14 U8.15 U8.16 U8.17 U8.19 U8.21 U8.22 U9.7 U9.8 U10.7 U10.8

## Text inside footprints (layer, text, board x,y; h text height)
U4: Top 3D Body "ANTENNA" at 0.102,49.135 h1.27 r90